# Altium PCB PCB1.PcbDoc
Units mm, origin at the board's own origin, x right, y up, seen from the top; angles counter-clockwise.
Board outline 80 x 82.5 mm, 2 copper layers (Top Layer, Bottom Layer), stack 1.581 mm thick; 136 components, 100 nets, 642 pads, 36 vias.
Unrouted connection lines stored in the file: 389.
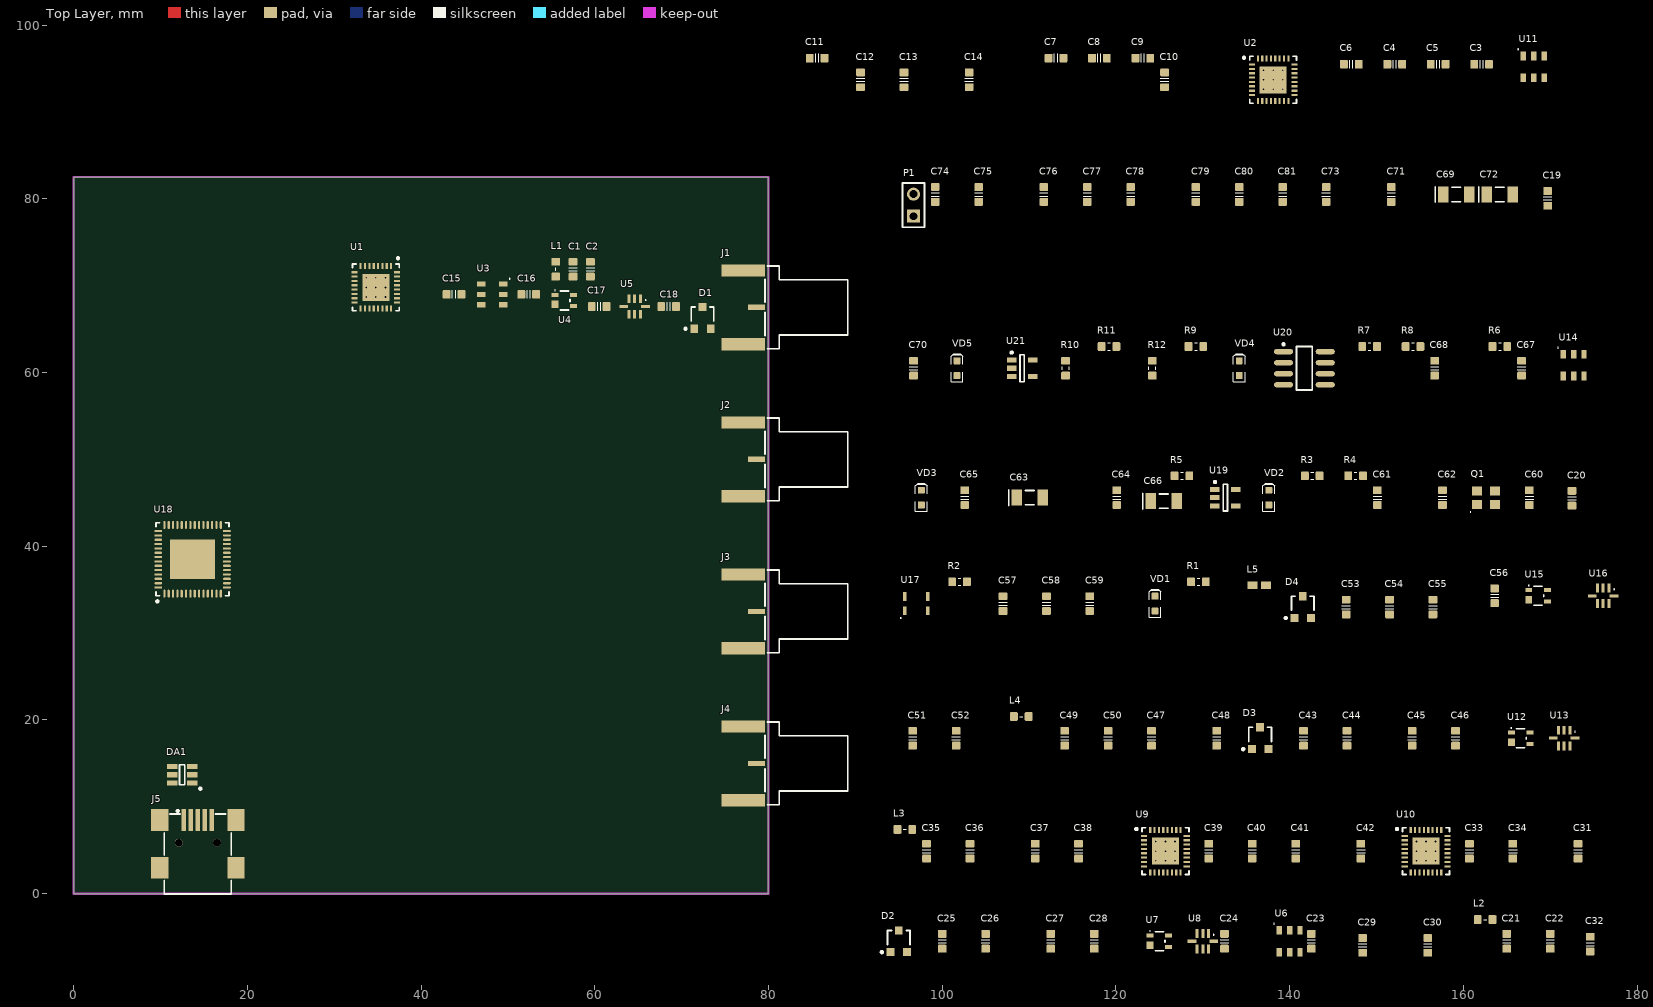
[diagram p0: Top Layer view]
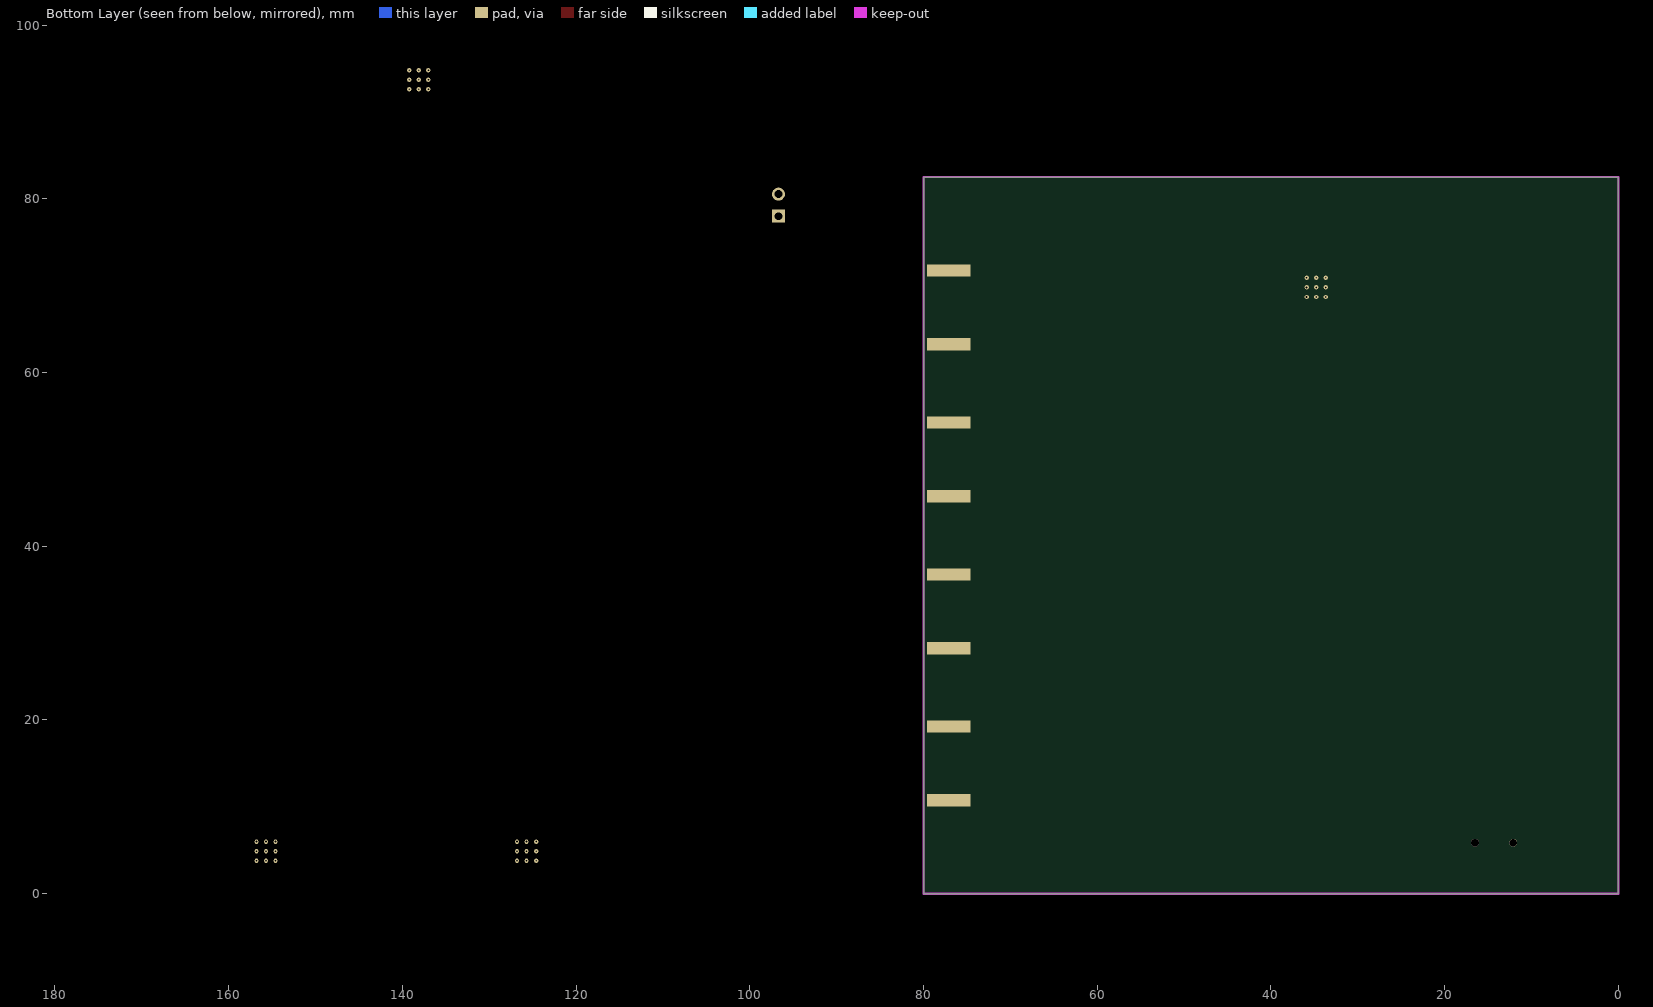
[diagram p1: Bottom Layer view, seen from below]

## Layer stack, top to bottom
Top Solder: solder mask 0.0102, Solder Resist, Dk 3.5
Top Layer: signal copper 0.0356
Dielectric 1: dielectric 1.51, FR-4, Dk 4.8
Bottom Layer: signal copper 0.0356
Bottom Solder: solder mask 0.0102, Solder Resist, Dk 3.5

## Board outline
0,0 80,0 80,82.5 0,82.5

## Design rules (kind name [scope] priority, off if disabled: settings)
Clearance [All] p1: gap=0.2 ignorepadtopadclearanceinfootprint=FALSE except(0: Arc-Hole Track-Hole SMDPad-Hole THPad-Hole Via-Hole Fill-Hole Poly-Hole Region-Hole Text-Hole)
PlaneConnect [All] p1: planeconnectstyle=Direct reliefexpansion=0.508 reliefentries=4 reliefconductorwidth=0.254 reliefairgap=0.254
PolygonConnect [All] p1: connectstyle=Direct reliefconductorwidth=0.254 reliefentries=4 polygonreliefangle="90 Angle" airgapwidth=0.254
RoutingVias [All] p1: holewidth=0.3 width=0.8 viastyle="Through Hole" minholewidth=0.3 minwidth=0.8 maxholewidth=3 maxwidth=10
SolderMaskExpansion [All] p1: expansion=0.102
Width [All] p1: maxlimit=3 minlimit=0.2 preferedwidth=0.4
29 further rules are at their usual default settings.

## Components (designator, comment, footprint, x,y, rotation, side; value= is the part's Value field where it differs from the comment)
C1 "56pF" CAP(0603) 57.5,71.9 r90 top
C2 "10nF" CAP(0603) 59.5,71.9 r90 top
C3 "0.1uF" CAP(0603) 162.1,95.5 r0 top
C4 "0.1uF" CAP(0603) 152.1,95.5 r0 top
C5 "0.1uF" CAP(0603) 157.1,95.5 r0 top
C6 "0.1uF" CAP(0603) 147.1,95.5 r0 top
C7 "0.1uF" CAP(0603) 113.1,96.2 r0 top
C8 "0.1uF" CAP(0603) 118.1,96.2 r0 top
C9 "1.0uF" CAP(0603) 123.1,96.2 r0 top
C10 "10nF" CAP(0603) 125.6,93.7 r90 top
C11 "0.1uF" CAP(0603) 85.6,96.2 r0 top
C12 "0.1uF" CAP(0603) 90.6,93.7 r90 top
C13 "1.0uF" CAP(0603) 95.6,93.7 r90 top
C14 "10nF" CAP(0603) 103.1,93.7 r90 top
C15 "56pF" CAP(0603) 43.8,69 r0 top
C16 "56pF" CAP(0603) 52.4,69 r0 top
C17 "56pF" CAP(0603) 60.5,67.6 r0 top
C18 "56pF" CAP(0603) 68.5,67.6 r0 top
C19 "1nF" CAP(0603) 169.7,80.05 r90 top
C20 "1nF" CAP(0603) 172.5,45.525 r90 top
C21 "56pF" CAP(0603) 165,-5.475 r90 top
C22 "10nF" CAP(0603) 170,-5.475 r90 top
C23 "1.0uF" CAP(0603) 142.5,-5.475 r90 top
C24 "1.0uF" CAP(0603) 132.5,-5.475 r90 top
C25 "56pF" CAP(0603) 100,-5.475 r90 top
C26 "56pF" CAP(0603) 105,-5.475 r90 top
C27 "56pF" CAP(0603) 112.5,-5.475 r90 top
C28 "56pF" CAP(0603) 117.5,-5.475 r90 top
C29 "0.1uF" CAP(0603) 148.4,-5.95 r90 top
C30 "0.1uF" CAP(0603) 155.9,-5.95 r90 top
C31 "0.1uF" CAP(0603) 173.2,4.9 r90 top
C32 "0.1uF" CAP(0603) 174.6,-5.8 r90 top
C33 "56pF" CAP(0603) 160.7,4.9 r90 top
C34 "10nF" CAP(0603) 165.7,4.9 r90 top
C35 "0.1uF" CAP(0603) 98.2,4.9 r90 top
C36 "0.1uF" CAP(0603) 103.2,4.9 r90 top
C37 "1.0uF" CAP(0603) 110.7,4.9 r90 top
C38 "10nF" CAP(0603) 115.7,4.9 r90 top
C39 "0.1uF" CAP(0603) 130.7,4.9 r90 top
C40 "0.1uF" CAP(0603) 135.7,4.9 r90 top
C41 "1.0uF" CAP(0603) 140.7,4.9 r90 top
C42 "10nF" CAP(0603) 148.2,4.9 r90 top
C43 "56pF" CAP(0603) 141.6,17.9 r90 top
C44 "56pF" CAP(0603) 146.6,17.9 r90 top
C45 "56pF" CAP(0603) 154.1,17.9 r90 top
C46 "56pF" CAP(0603) 159.1,17.9 r90 top
C47 "1nF" CAP(0603) 124.1,17.9 r90 top
C48 "1nF" CAP(0603) 131.6,17.9 r90 top
C49 "56pF" CAP(0603) 114.1,17.9 r90 top
C50 "10nF" CAP(0603) 119.1,17.9 r90 top
C51 "1.0uF" CAP(0603) 96.6,17.9 r90 top
C52 "1.0uF" CAP(0603) 101.6,17.9 r90 top
C53 "56pF" CAP(0603) 146.5,33 r90 top
C54 "56pF" CAP(0603) 151.5,33 r90 top
C55 "56pF" CAP(0603) 156.5,33 r90 top
C56 "56pF" CAP(0603) 163.6,34.3 r90 top
C57 "0.01uF" CAP(0603) 107,33.4 r90 top
C58 "0.1uF" CAP(0603) 112,33.4 r90 top
C59 "4.7uF" CAP(0603) 117,33.4 r90 top
C60 "0.1uF" CAP(0603) 167.6,45.6 r90 top
C61 "12pF" CAP(0603) 150.1,45.6 r90 top
C62 "12pF" CAP(0603) 157.6,45.6 r90 top
C63 "10uF" CC3216(1206)x18 110.1,45.6 r0 top
C64 "0.1uF" CAP(0603) 120.1,45.6 r90 top
C65 "0.1uF" CAP(0603) 102.6,45.6 r90 top
C66 "22uF" CC3216(1206)x18 125.5,45.2 r0 top
C67 "0.1uF" CAP(0603) 166.7,60.5 r90 top
C68 "0.1uF" CAP(0603) 156.7,60.5 r90 top
C69 "10uF" CC3216(1206)x18 159.2,80.5 r0 top
C70 "0.1uF" CAP(0603) 96.7,60.5 r90 top
C71 "0.1uF" CAP(0603) 151.7,80.5 r90 top
C72 "22uF" CC3216(1206)x18 164.2,80.5 r0 top
C73 "0.1uF" CAP(0603) 144.2,80.5 r90 top
C74 "0.1uF" CAP(0603) 99.2,80.5 r90 top
C75 "0.1uF" CAP(0603) 104.2,80.5 r90 top
C76 "0.1uF" CAP(0603) 111.7,80.5 r90 top
C77 "0.1uF" CAP(0603) 116.7,80.5 r90 top
C78 "0.1uF" CAP(0603) 121.7,80.5 r90 top
C79 "0.1uF" CAP(0603) 129.2,80.5 r90 top
C80 "0.1uF" CAP(0603) 134.2,80.5 r90 top
C81 "0.1uF" CAP(0603) 139.2,80.5 r90 top
D1 "BAV99" SOT-23B 72.4,66.3 r0 top
D2 "BAV99" SOT-23B 95,-5.475 r0 top
D3 "BAV99" SOT-23B 136.6,17.9 r0 top
D4 "BAV99" SOT-23B 141.5,33 r0 top
DA1 "usblc6-2sc6" SOT23-6L 12.5,13.7 r180 top
J1 "60312202114514" 60312202114514 79.6,67.5 r90 top
J2 "60312202114514" 60312202114514 79.6,50 r90 top
J3 "60312202114514" 60312202114514 79.6,32.5 r90 top
J4 "60312202114514" 60312202114514 79.6,15 r90 top
J5 "USB 2.0 mini" 65100516121 14.3,4.6 r0 top
L1 "100nH" L_0603 55.5,71.9 r90 top
L2 "100nH" L_0603 162.5,-2.975 r0 top
L3 "100nH" L_0603 95.7,7.4 r0 top
L4 "100nH" L_0603 109.1,20.4 r0 top
L5 "BLM18EG221SN1" BLM18EG221SN1 136.5,35.5 r0 top
P1 "Header 2" HDR1X2 96.7,78 r90 top
Q1 "Crystal 24MHz" SMD3225 162.6,45.6 r0 top
R1 "4.7K" RES(0603) 129.5,35.9 r0 top
R2 "100K" RES(0603) 102,35.9 r0 top
R3 "10K" RES(0603) 142.6,48.1 r0 top
R4 "4.7K" RES(0603) 147.6,48.1 r0 top
R5 "4.7K" RES(0603) 127.6,48.1 r0 top
R6 "4.7K" RES(0603) 164.2,63 r0 top
R7 "4.7K" RES(0603) 149.2,63 r0 top
R8 "4.7K" RES(0603) 154.2,63 r0 top
R9 "4.7K" RES(0603) 129.2,63 r0 top
R10 "10K" RES(0603) 114.2,60.5 r90 top
R11 "10K" RES(0603) 119.2,63 r0 top
R12 "10K" RES(0603) 124.2,60.5 r90 top
U1 "SX1257" QFN-32 34.8,69.8 r270 top
U2 "SX1257" QFN-32 138.1,93.7 r0 top
U3 "B39871B3725U410" SAW_Filter 48.2,69 r270 top
U4 "SPF5043Z" SOT343-4 56.5,68.3 r0 top
U5 "0868LP15A020" LPF868 64.6,67.6 r0 top
U6 "B39871B3725U410" SAW_Filter 140,-5.475 r0 top
U7 "SPF5043Z" SOT343-4 125,-5.475 r0 top
U8 "0868LP15A020" LPF868 130,-5.475 r0 top
U9 "SX1257" QFN-32 125.7,4.9 r0 top
U10 "SX1257" QFN-32 155.7,4.9 r0 top
U11 "B39871B3725U410" SAW_Filter 168.1,95.2 r0 top
U12 "SPF5043Z" SOT343-4 166.6,17.9 r0 top
U13 "0868LP15A020" LPF868 171.6,17.9 r0 top
U14 "B39871B3725U410" SAW_Filter 172.7,60.85 r0 top
U15 "SPF5043Z" SOT343-4 168.6,34.3 r0 top
U16 "0868LP15A020" LPF868 176.1,34.3 r0 top
U17 "TCXO 32MHz" TCXO 97,33.4 r0 top
U18 "CY7C68013A-56LTXC" CYP-LTX56-5200X4500TP_N 13.7,38.5 r90 top
U19 "TPS73633DBVT" TI-DBV5_N 132.6,45.6 r0 top
U20 "AT24C128" 8S1_N 141.7,60.5 r0 top
U21 "TPS73633DBVT" TI-DBV5_N 109.2,60.5 r0 top
VD1 "VD_6" LED_0603 124.5,33.4 r90 top
VD2 "VD_6" LED_0603 137.6,45.6 r90 top
VD3 "VD_6" LED_0603 97.6,45.6 r90 top
VD4 "VD_6" LED_0603 134.2,60.5 r90 top
VD5 "VD_6" LED_0603 101.7,60.5 r90 top

## Footprints (in the part's own frame and the unit in brackets; to place one, negate y for a bottom-side part, rotate by r counter-clockwise, add the part's x,y. Pads: shape width x height; smd on the part's side, far side on the other; paste and mask are expansions set on the pad)
8S1_N [mm] "SOIC, 8-Leads, Body 4.9x3.9mm, Pitch 1.27mm, IPC Medium Density"
  oval 2.2x0.6 smd: 1(-2.4,1.905) 2(-2.4,0.635) 3(-2.4,-0.635) 4(-2.4,-1.905) 5(2.4,-1.905) 6(2.4,-0.635) 7(2.4,0.635) 8(2.4,1.905)
  silkscreen extent -2.52,-2.5 0.9,2.88, body extent -3.1,-2.5 3.1,2.5, height 1.75
65100516121 [mm] "Mini USB 2.0 Type B SMT Horizontal 5 Contacts"
  rect 0.5x2.5 smd: 1(-1.6,3.875) 2(-0.8,3.875) 3(0,3.875) 4(0.8,3.875) 5(1.6,3.875)
  rect 2x2.5 smd: Shell(-4.4,-1.625) Shell(-4.4,3.875) Shell(4.4,-1.625) Shell(4.4,3.875)
  round 0.9 hole 0.9 unplated: ""(-2.2,1.275) ""(2.2,1.275)
  silkscreen extent -3.85,-4.62 3.85,5.04, body extent -4.8,-4.63 4.8,4.62, height 3.92
60312202114514 [mm] "SMA PCB End Launch Jack Flat  Tab for 1.6mm PCB"
  rect 0.61x1.97 smd: 1(0,0.985)
  rect 1.4x5 smd: 2(-4.25,2.5) 3(4.25,2.5)
  rect 1.4x5 smd far side: 4(-4.25,2.5) 5(4.25,2.5)
  silkscreen extent -4.76,-9.53 4.76,0, body extent -4.76,-9.53 4.76,4.76, height 4.08
BLM18EG221SN1 [mm] "Molded Inductor, 2-Leads, Body 1,60x0,80mm, IPC Medium Density"
  rect 1.2x0.85 smd: 1(-0.775,0) 2(0.775,0)
  body extent -0.8,-0.4 0.8,0.4, height 0.8
CAP(0603) [mm]
  round 0.254 on Mech15: 0(0,0)
  rrect25% 0.9x1 smd: 1(-0.85,0) 2(0.85,0)
  Top Layer pour cut-out: -0.6,0.5 -0.4,0.7 0.4,0.7 0.6,0.5 0.6,-0.5 0.4,-0.7 -0.4,-0.7 -0.6,-0.5
  silkscreen extent -0.18,-0.48 0.18,0.48, body extent -0.9,-0.45 0.9,0.45, height 0.5
CC3216(1206)x18 [mm]
  rect 1.2x1.85 smd: 1(-1.5,0) 2(1.5,0)
  silkscreen extent -2.42,-0.9 0.5,0.9, body extent -1.7,-0.9 1.7,0.9, height 1.6
CYP-LTX56-5200X4500TP_N [mm] "QFN, 56-Leads, Body 8.1x8.1mm, Pitch 0.5mm, Thermal Pad 5.2x4.5mm, IPC Medium Density"
  oval 0.9x0.25 smd: 1(-3.95,3.25) 2(-3.95,2.75) 3(-3.95,2.25) 4(-3.95,1.75) 5(-3.95,1.25) 6(-3.95,0.75) 7(-3.95,0.25) 8(-3.95,-0.25) 9(-3.95,-0.75) 10(-3.95,-1.25) 11(-3.95,-1.75) 12(-3.95,-2.25) 13(-3.95,-2.75) 14(-3.95,-3.25) 29(3.95,-3.25) 30(3.95,-2.75) 31(3.95,-2.25) 32(3.95,-1.75) 33(3.95,-1.25) 34(3.95,-0.75) 35(3.95,-0.25) 36(3.95,0.25) 37(3.95,0.75) 38(3.95,1.25) 39(3.95,1.75) 40(3.95,2.25) 41(3.95,2.75) 42(3.95,3.25)
  oval 0.25x0.9 smd: 15(-3.25,-3.95) 16(-2.75,-3.95) 17(-2.25,-3.95) 18(-1.75,-3.95) 19(-1.25,-3.95) 20(-0.75,-3.95) 21(-0.25,-3.95) 22(0.25,-3.95) 23(0.75,-3.95) 24(1.25,-3.95) 25(1.75,-3.95) 26(2.25,-3.95) 27(2.75,-3.95) 28(3.25,-3.95) 43(3.25,3.95) 44(2.75,3.95) 45(2.25,3.95) 46(1.75,3.95) 47(1.25,3.95) 48(0.75,3.95) 49(0.25,3.95) 50(-0.25,3.95) 51(-0.75,3.95) 52(-1.25,3.95) 53(-1.75,3.95) 54(-2.25,3.95) 55(-2.75,3.95) 56(-3.25,3.95)
  rect 4.5x5.2 smd: 57(0,0)
  silkscreen extent -4.97,-4.2 4.2,4.2, body extent -4,-4 4,4, height 0.95
HDR1X2 [mm] "Connector; Header; 2 Position"
  rect 1.5x1.5 hole 0.9: 1(0,0)
  round 1.5 hole 0.9: 2(2.54,0)
  silkscreen extent -1.27,-1.27 3.81,1.27
L_0603 [mm] "Chip Inductor, 2-Leads"
  round 0.254 on Mech15: 0(0,0)
  rrect25% 0.9x1 smd: 1(-0.85,0) 2(0.85,0)
  Top Layer pour cut-out: -0.6,0.5 -0.4,0.7 0.4,0.7 0.6,0.5 0.6,-0.5 0.4,-0.7 -0.4,-0.7 -0.6,-0.5
  silkscreen extent -0.18,0 0.18,0, body extent -0.9,-0.47 0.9,0.48, height 0.5
LED_0603 [mm] "Molded Diode, 2-Leads, Body 1,60x0,80mm, IPC Medium Density"
  round 0.254 on Mech15: 0(0,0)
  rrect25% 0.8x0.8 smd: A(-0.85,0) K(0.85,0)
  Top Layer pour cut-out: -0.5,0.5 0.5,0.5 0.5,-0.5 -0.5,-0.5
  silkscreen extent -1.55,-0.67 1.68,0.67, body extent -0.8,-0.4 0.8,0.4, height 0.75
LPF868 [mm]
  rect 0.35x1 smd: 1(0.65,0.9) 2(0,0.9) 3(-0.65,0.9) 5(-0.65,-0.9) 6(0,-0.9) 7(0.65,-0.9)
  rect 1x0.35 smd: 4(-1.25,0) 8(1.25,0)
  silkscreen extent 1.2,0.7 1.3,0.8, body extent -1,-0.63 1,0.63, height 1
QFN-32 [mm] "QFN, 32-Leads, Body 5,00x5,00mm, Pitch 0,50mm, Thermal Pad 3,10x3,10mm, IPC Medium Density"
  rect 0.7x0.25 smd: 1(-2.45,1.75) 2(-2.45,1.25) 3(-2.45,0.75) 4(-2.45,0.25) 5(-2.45,-0.25) 6(-2.45,-0.75) 7(-2.45,-1.25) 8(-2.45,-1.75) 17(2.45,-1.75) 18(2.45,-1.25) 19(2.45,-0.75) 20(2.45,-0.25) 21(2.45,0.25) 22(2.45,0.75) 23(2.45,1.25) 24(2.45,1.75)
  rect 0.25x0.7 smd: 9(-1.75,-2.45) 10(-1.25,-2.45) 11(-0.75,-2.45) 12(-0.25,-2.45) 13(0.25,-2.45) 14(0.75,-2.45) 15(1.25,-2.45) 16(1.75,-2.45) 25(1.75,2.45) 26(1.25,2.45) 27(0.75,2.45) 28(0.25,2.45) 29(-0.25,2.45) 30(-0.75,2.45) 31(-1.25,2.45) 32(-1.75,2.45)
  rect 3.1x3.1 smd: 33(0,0)
  silkscreen extent -3.47,-2.7 2.7,2.7, body extent -2.55,-2.55 2.55,2.55, height 0.75
RES(0603) [mm] "Res 0603"
  round 0.254 on Mech15: 0(0,0)
  rrect25% 0.9x1 smd: 1(-0.85,0) 2(0.85,0)
  Top Layer pour cut-out: -0.6,0.5 -0.4,0.7 0.4,0.7 0.6,0.5 0.6,-0.5 0.4,-0.7 -0.4,-0.7 -0.6,-0.5
  silkscreen extent -0.15,-0.41 0.15,0.41, body extent -0.9,-0.47 0.9,0.48, height 0.5
SAW_Filter [mm] "B39871B3725U410"
  rect 0.6x1 smd: 1(-1.2,1.25) 2(0,1.25) 3(1.2,1.25) 4(1.2,-1.25) 5(0,-1.25) 6(-1.2,-1.25)
  silkscreen extent -1.85,1.95 -1.75,2.05, body extent -1.5,-1.5 1.5,1.5, height 0.95
SMD3225 [mm] "DFN, 4-Leads, Body 2,50x3,20mm, Pitch 2,10mm, IPC Medium Density"
  rect 1.15x1.05 smd: 1(-1.05,-0.775) 2(1.05,-0.775) 3(1.05,0.775) 4(-1.05,0.775)
  silkscreen extent -1.83,-1.7 -1.73,-1.6, body extent -1.6,-1.25 1.6,1.25, height 0.61
SOT23-6L [mm] "SOT23-6L"
  rect 1.2x0.6 smd: 1(-1.15,0.95) 2(-1.15,0) 3(-1.15,-0.95) 4(1.15,-0.95) 5(1.15,0) 6(1.15,0.95)
  silkscreen extent -2.23,-1.15 0.3,1.72, body extent -1.51,-1.53 1.49,1.52, height 1.4
SOT343-4 [mm] "SOT343, 4-Leads, Body 2,00x2,10mm, Pitch 1,30mm, IPC Medium Density"
  rect 0.8x0.45 smd: 1(-1.07,0.65) 3(1.07,-0.65) 4(1.07,0.65)
  rect 0.8x0.85 smd: 2(-1.07,-0.45)
  silkscreen extent -1.12,-1.1 0.65,1.22, body extent -0.9,-1.1 0.9,1.1, height 0.94
SOT-23B [mm] "SOT-23; 3 Leads; Body 3.0 x 2.6 mm, inc. leads (LxW max)"
  rect 0.9x0.95 smd: 1(-0.95,-1.25) 2(0.95,-1.25) 3(0,1.25)
  silkscreen extent -2.07,-1.37 1.3,1.25, body extent -1.45,-1.15 1.45,1.15, height 1.1
TCXO [mm]
  rect 0.4x1 smd: 1(-1.325,-0.825) 2(1.325,-0.825) 3(1.325,0.825) 4(-1.325,0.825)
  silkscreen extent -1.83,-1.7 -1.73,-1.6, body extent -1.6,-1.25 1.6,1.25, height 0.61
TI-DBV5_N [mm] "SOT23, 5-Leads, Body 2.9x1.6mm, Pitch 0.95mm, IPC Medium Density"
  rect 1.1x0.6 smd: 1(-1.2,0.95) 2(-1.2,0) 3(-1.2,-0.95) 4(1.2,-0.95) 5(1.2,0.95)
  silkscreen extent -1.32,-1.55 0.25,1.92, body extent -0.87,-1.52 0.87,1.53, height 1.45

## Part data
C1 C2 C3 C4 C5 C6 C7 C8 C9 C10 C11 C12 C13 C14 C15 C16 C17 C18 C19 C20 C21 C22 C23 C24 C25 C26 C27 C28 C29 C30 C31 C32 C33 C34 C35 C36 C37 C38 C39 C40 C41 C42 C43 C44 C45 C46 C47 C48 C49 C50 C51 C52 C53 C54 C55 C56 C57 C58 C59 C60 C61 C62 C64 C65 C67 C68 C70 C71 C73 C74 C75 C76 C77 C78 C79 C80 C81: library part CAP
C63 C66 C69 C72: library part Tantalum, "Tantalum SMD capacitor"
J1 J2 J3 J4: "WR-SMA SMA PCB End Launch Jack Flat Tab for 1.6 mm PCB", Frequency Range="DC~18 GHz", Operating Temperature="-65 to 165 degC", ComponentLink1Description=Manufacturer, ComponentLink1URL=http://www.we-online.de, ComponentLink2Description=Datasheet, ComponentLink2URL=https://katalog.we-online.de/em/datasheet/60312202114514.pdf, Connector Type=SMA, Gender=Jack, Impedance="50 Ohm", Mounting Technology=SMT, Orientation Type=Straight, Packaging=Tray, Part Number=60312202114514, Published Date="August 2018", Publisher="Wurth Elektronik"
J5: "Mini USB 2.0 Type B SMT Horizontal 5 Contacts WR-COM"
L1 L2 L3 L4: library part IND
L5: "SMD Ferrite Bead 2A 220 Ohm(100MHz)", Current="2 A", DC Resistance="0.05 Ohm", Impedance="220 Ohm (100MHz) / 260 Ohm (1GHz)", Name="Чип-феррит BLM18EG221SN1", Ta=-55+125, Type=Inductor, Vendor1="Murata Manufacturing, Co., Japan", Vendor1Name=BLM18EG221SN1
P1: "Header, 2-Pin", LatestRevisionDate=17-Jul-2002, LatestRevisionNote="Re-released for DXP Platform.", Publisher="Altium Limited"
R1 R2 R3 R4 R5 R6 R7 R8 R9 R10 R11 R12: library part RES, "Chip Resistor"
U3 U6 U11 U14: "SAW Filter, 869MHz Center"
U17: library part TCXO
U18: "EZ-USB(R) FX2LP(TM) USB Microcontroller High-Speed USB Peripheral Controller, 16 KB, 24 I/Os, 3 to 3.6 V, 0 to 70 degC, 56-Pin QFN (LTX56), Tray"
U19 U21: "Single Output Low Noise LDO, 400 mA, Fixed 3.3 V Output, 1.7 to 5.5 V Input, with Reverse Current Protection, 5-pin SOT-23 (DBV), -40 to 85 degC, Green (RoHS & no Sb/Br)", Manufacturer="Texas Instruments", Rating=Catalog, Accuracy(%)=1, Code_JEDEC=MO-178, DatasheetVersion=SBVS038T, Eco-Plan="Green (RoHS & no Sb/Br)", Fixed Output Options(V)=3.3, Iout(Max)(A)=0.4, Iq(Typ)(mA)=0.3, Mounting Technology="Surface Mount", PackageDescription="5-Pin Plastic Small Outline, Body 1.60 × 2.90 mm, Pitch 0.95 mm", PackageReference=DBV5, PackageVersion=4073253-4/K, PartNumber=TPS73633DBVT, SubFamily="Single Channel LDO", Vdo(Typ)(mV)=75, Vin(Max)(V)=5.5, Vin(Min)(V)=1.7, Vout Adj(Max)(V)=3.3, Vout Adj(Min)(V)=3.3

## Via types
v1: diameter 0.5, hole 0.2, Top Layer to Bottom Layer, 36 vias

## Nets (pads, with @x,y where several pads share a name; then routed paths per layer and width w, separated by ;. In a path a pad name is that pad's centre, name@x,y a point inside that pad or via, vN(x,y) a via of type N, cw(c..) or ccw(c..) an arc to the next point about the centre after c; other vN are vias at no path point)
3V3: C68.2 C71.2 C72.1 C74.2 C75.2 C76.2 C77.2 C78.2 C79.2 C80.2 C81.2 R7.2 R8.2 R11.1 R12.2 U18.3 U18.7 U18.11 U18.17 U18.27 U18.32 U18.43 U18.55 U20.8 U21.5
3V3A: C1.2 C2.2 C4.2 C6.2 C9.1 C13.1 C21.2 C22.2 C23.2 C24.2 C31.2 C32.2 C33.2 C34.2 C37.1 C41.1 C49.2 C50.2 C51.2 C52.2 C60.2 C65.2 C66.1 L1.2 L2.2 L3.2 L4.2 U1.2 U1.16 U1.32 U2.2 U2.16 U2.32 U9.2 U9.16 U9.32 U10.2 U10.16 U10.32 U17.4 U19.5
5V: C58.2 C59.2 C63.1 C64.2 C69.1 C70.2 L5.2 R1.1 R3.1 R10.1 U19.1 U21.1
A_I: U1.15 U18.24
A_Q: U1.14 U18.25
AT_SCL: R7.1 U18.15 U20.6
AT_SDA: P1.1 R8.1 U18.16
B_I: U2.15 U18.22
B_Q: U2.14 U18.23
C_I: U9.15 U18.20
C_Q: U9.14 U18.21
CLK_OUT_A: U1.10 U18.13
D+_P: DA1.3 J5.3
D-_N: DA1.1 J5.2
D_I: U10.15 U18.18
D_Q: U10.14 U18.19
DMINUS: DA1.6 U18.9
DPLUS: DA1.4 U18.8
GND: C1.1 C2.1 C3.2 C4.1 C5.2 C6.1 C7.2 C8.2 C9.2 C10.2 C11.2 C12.2 C13.2 C14.2 C21.1 C22.1 C23.1 C24.1 C29.2 C30.2 C31.1 C32.1 C33.1 C34.1 C35.2 C36.2 C37.2 C38.2 C39.2 C40.2 C41.2 C42.2 C49.1 C50.1 C51.1 C52.1 C57.1 C58.1 C59.1 C60.1 C61.1 C62.1 C63.2 C64.1 C65.1 C66.2 C67.1 C68.1 C69.2 C70.1 C71.1 C72.2 C73.1 C74.1 C75.1 C76.1 C77.1 C78.1 C79.1 C80.1 C81.1 D1.1 D1.2 D2.1 D2.2 D3.1 D3.2 D4.1 D4.2 DA1.2 J1.2 J1.3 J1.4 J1.5 J2.2 J2.3 J2.4 J2.5 J3.2 J3.3 J3.4 J3.5 J4.2 J4.3 J4.4 J4.5 J5.5 J5.Shell Q1.2 Q1.4 R2.1 U1.4 U1.7 U1.12 U1.13 U1.26 U1.28 U1.31 U1.33 U2.4 U2.7 U2.12 U2.13 U2.26 U2.28 U2.31 U2.33 U3.1 U3.3 U3.4 U3.6 U4.2 U4.4 U5.1 U5.3 U5.5 U5.7 U6.1 U6.3 U6.4 U6.6 U7.2 U7.4 U8.1 U8.3 U8.5 U8.7 U9.4 U9.7 U9.12 U9.13 U9.26 U9.28 U9.31 U9.33 U10.4 U10.7 U10.12 U10.13 U10.26 U10.28 U10.31 U10.33 U11.1 U11.3 U11.4 U11.6 U12.2 U12.4 U13.1 U13.3 U13.5 U13.7 U14.1 U14.3 U14.4 U14.6 U15.2 U15.4 U16.1 U16.3 U16.5 U16.7 U17.1 U17.2 U18.6 U18.10 U18.12 U18.14 U18.26 U18.28 U18.41 U18.53 U18.56 U18.57 U19.2 U20.1 U20.2 U20.3 U20.4 U20.7 U21.2 VD1.K VD2.K VD3.K VD4.K VD5.K
  other v1: 124.6,3.8 125.7,3.8 126.8,3.8 154.6,3.8 155.7,3.8 156.8,3.8 124.6,4.9 125.7,4.9 126.8,4.9 154.6,4.9 155.7,4.9 156.8,4.9 124.6,6 125.7,6 126.8,6 154.6,6 155.7,6 156.8,6 33.7,68.7 34.8,68.7 35.9,68.7 33.7,69.8 34.8,69.8 35.9,69.8 33.7,70.9 34.8,70.9 35.9,70.9 137,92.6 138.1,92.6 139.2,92.6 137,93.7 138.1,93.7 139.2,93.7 137,94.8 138.1,94.8 139.2,94.8
NetC3_1: C3.1 U1.25
NetC5_1: C5.1 U2.25
NetC7_1: C7.1 U1.5
NetC8_1: C8.1 U1.3
NetC10_1: C10.1 U1.1
NetC11_1: C11.1 U2.5
NetC12_1: C12.1 U2.3
NetC14_1: C14.1 U2.1
NetC15_2: C15.2 U3.5
NetC16_1: C16.1 U3.2
NetC16_2: C16.2 L1.1 U4.1
NetC17_1: C17.1 U4.3
NetC17_2: C17.2 U5.4
NetC18_1: C18.1 U5.8
NetC18_2: C18.2 D1.3 J1.1
NetC19_2: C19.2 U1.8
NetC20_2: C20.2 U2.8
NetC25_2: C25.2 U6.5
NetC26_1: C26.1 U6.2
NetC26_2: C26.2 L2.1 U7.1
NetC27_1: C27.1 U7.3
NetC27_2: C27.2 U8.4
NetC28_1: C28.1 U8.8
NetC28_2: C28.2 D2.3 J2.1
NetC29_1: C29.1 U9.25
NetC30_1: C30.1 U10.25
NetC35_1: C35.1 U9.5
NetC36_1: C36.1 U9.3
NetC38_1: C38.1 U9.1
NetC39_1: C39.1 U10.5
NetC40_1: C40.1 U10.3
NetC42_1: C42.1 U10.1
NetC43_2: C43.2 U11.5
NetC44_1: C44.1 U11.2
NetC44_2: C44.2 L3.1 U12.1
NetC45_1: C45.1 U12.3
NetC45_2: C45.2 U13.4
NetC46_1: C46.1 U13.8
NetC46_2: C46.2 D3.3 J3.1
NetC47_2: C47.2 U9.8
NetC48_2: C48.2 U10.8
NetC53_2: C53.2 U14.5
NetC54_1: C54.1 U14.2
NetC54_2: C54.2 L4.1 U15.1
NetC55_1: C55.1 U15.3
NetC55_2: C55.2 U16.4
NetC56_1: C56.1 U16.8
NetC56_2: C56.2 D4.3 J4.1
NetC67_2: C67.2 U19.4
NetC73_2: C73.2 U21.4
NetJ5_4: J5.4 R2.2
NetP1_2: P1.2 U20.5
NetR1_2: R1.2 VD1.A
NetR3_2: R3.2 U19.3
NetR4_1: R4.1 U18.46
NetR4_2: R4.2 VD2.A
NetR5_1: R5.1 U18.48
NetR5_2: R5.2 VD3.A
NetR6_1: R6.1 U18.50
NetR6_2: R6.2 VD4.A
NetR9_1: R9.1 U18.52
NetR9_2: R9.2 VD5.A
NetR10_2: R10.2 U21.3
NetR11_2: R11.2 U18.44
NetR12_1: R12.1 U18.42
QX1: C62.2 Q1.1 U18.5
QX2: C61.2 Q1.3 U18.4
RESET_ABCD: U1.9 U2.9 U9.9 U10.9 U18.40
RF_IN_A: C15.1 U1.27
RF_IN_B: C25.1 U2.27
RF_IN_C: C43.1 U9.27
RF_IN_D: C53.1 U10.27
SPI_MISO: U1.18 U2.18 U9.18 U10.18 U18.35
SPI_MOSI: U1.19 U2.19 U9.19 U10.19 U18.34
SPI_NSS_A: U1.20 U18.36
SPI_NSS_B: U2.20 U18.37
SPI_NSS_C: U9.20 U18.38
SPI_NSS_D: U10.20 U18.39
SPI_SCK: U1.17 U2.17 U9.17 U10.17 U18.33
TCXO_CLK: C19.1 C20.1 C47.1 C48.1 U17.3
Vbus: C57.2 DA1.5 J5.1 L5.1
pads on no net: C1.0 C2.0 C3.0 C4.0 C5.0 C6.0 C7.0 C8.0 C9.0 C10.0 C11.0 C12.0 C13.0 C14.0 C15.0 C16.0 C17.0 C18.0 C19.0 C20.0 C21.0 C22.0 C23.0 C24.0 C25.0 C26.0 C27.0 C28.0 C29.0 C30.0 C31.0 C32.0 C33.0 C34.0 C35.0 C36.0 C37.0 C38.0 C39.0 C40.0 C41.0 C42.0 C43.0 C44.0 C45.0 C46.0 C47.0 C48.0 C49.0 C50.0 C51.0 C52.0 C53.0 C54.0 C55.0 C56.0 C57.0 C58.0 C59.0 C60.0 C61.0 C62.0 C64.0 C65.0 C67.0 C68.0 C70.0 C71.0 C73.0 C74.0 C75.0 C76.0 C77.0 C78.0 C79.0 C80.0 C81.0 J5. L1.0 L2.0 L3.0 L4.0 R1.0 R2.0 R3.0 R4.0 R5.0 R6.0 R7.0 R8.0 R9.0 R10.0 R11.0 R12.0 U1.6 U1.11 U1.21 U1.22 U1.23 U1.24 U1.29 U1.30 U2.6 U2.10 U2.11 U2.21 U2.22 U2.23 U2.24 U2.29 U2.30 U5.2 U5.6 U8.2 U8.6 U9.6 U9.10 U9.11 U9.21 U9.22 U9.23 U9.24 U9.29 U9.30 U10.6 U10.10 U10.11 U10.21 U10.22 U10.23 U10.24 U10.29 U10.30 U13.2 U13.6 U16.2 U16.6 U18.1 U18.2 U18.29 U18.30 U18.31 U18.45 U18.47 U18.49 U18.51 U18.54 VD1.0 VD2.0 VD3.0 VD4.0 VD5.0

## Keep-outs
Keep-Out Layer:
  the board outline again, w0.254

## Silkscreen, mask and mechanical layers (free items; w line width, h text height)
Mechanical 1:
  the board outline again, w0.2

## Text inside footprints (layer, text, board x,y; h text height)
J1: Mechanical 2 "PCB Thickness 1.6mm" at 89.8,63.8 h0.8 r90; Mechanical 2 "PCB End" at 80.3,66 h0.8 r90
J2: Mechanical 2 "PCB Thickness 1.6mm" at 89.8,46.3 h0.8 r90; Mechanical 2 "PCB End" at 80.3,48.5 h0.8 r90
J3: Mechanical 2 "PCB Thickness 1.6mm" at 89.8,28.8 h0.8 r90; Mechanical 2 "PCB End" at 80.3,31 h0.8 r90
J4: Mechanical 2 "PCB Thickness 1.6mm" at 89.8,11.3 h0.8 r90; Mechanical 2 "PCB End" at 80.3,13.5 h0.8 r90